# Altium PCB PX4FLOW2.1_X0.PcbDoc (part 2 of 2)
Units mm, origin at the board's own origin, x right, y up, seen from the top; angles counter-clockwise.
Board outline 26.52 x 51.99 mm, 6 copper layers (Top, Signal Layer 1, Signal Layer 2, Route2, Route15, Bottom), stack 1.474 mm thick; 94 components, 98 nets, 424 pads, 377 vias.
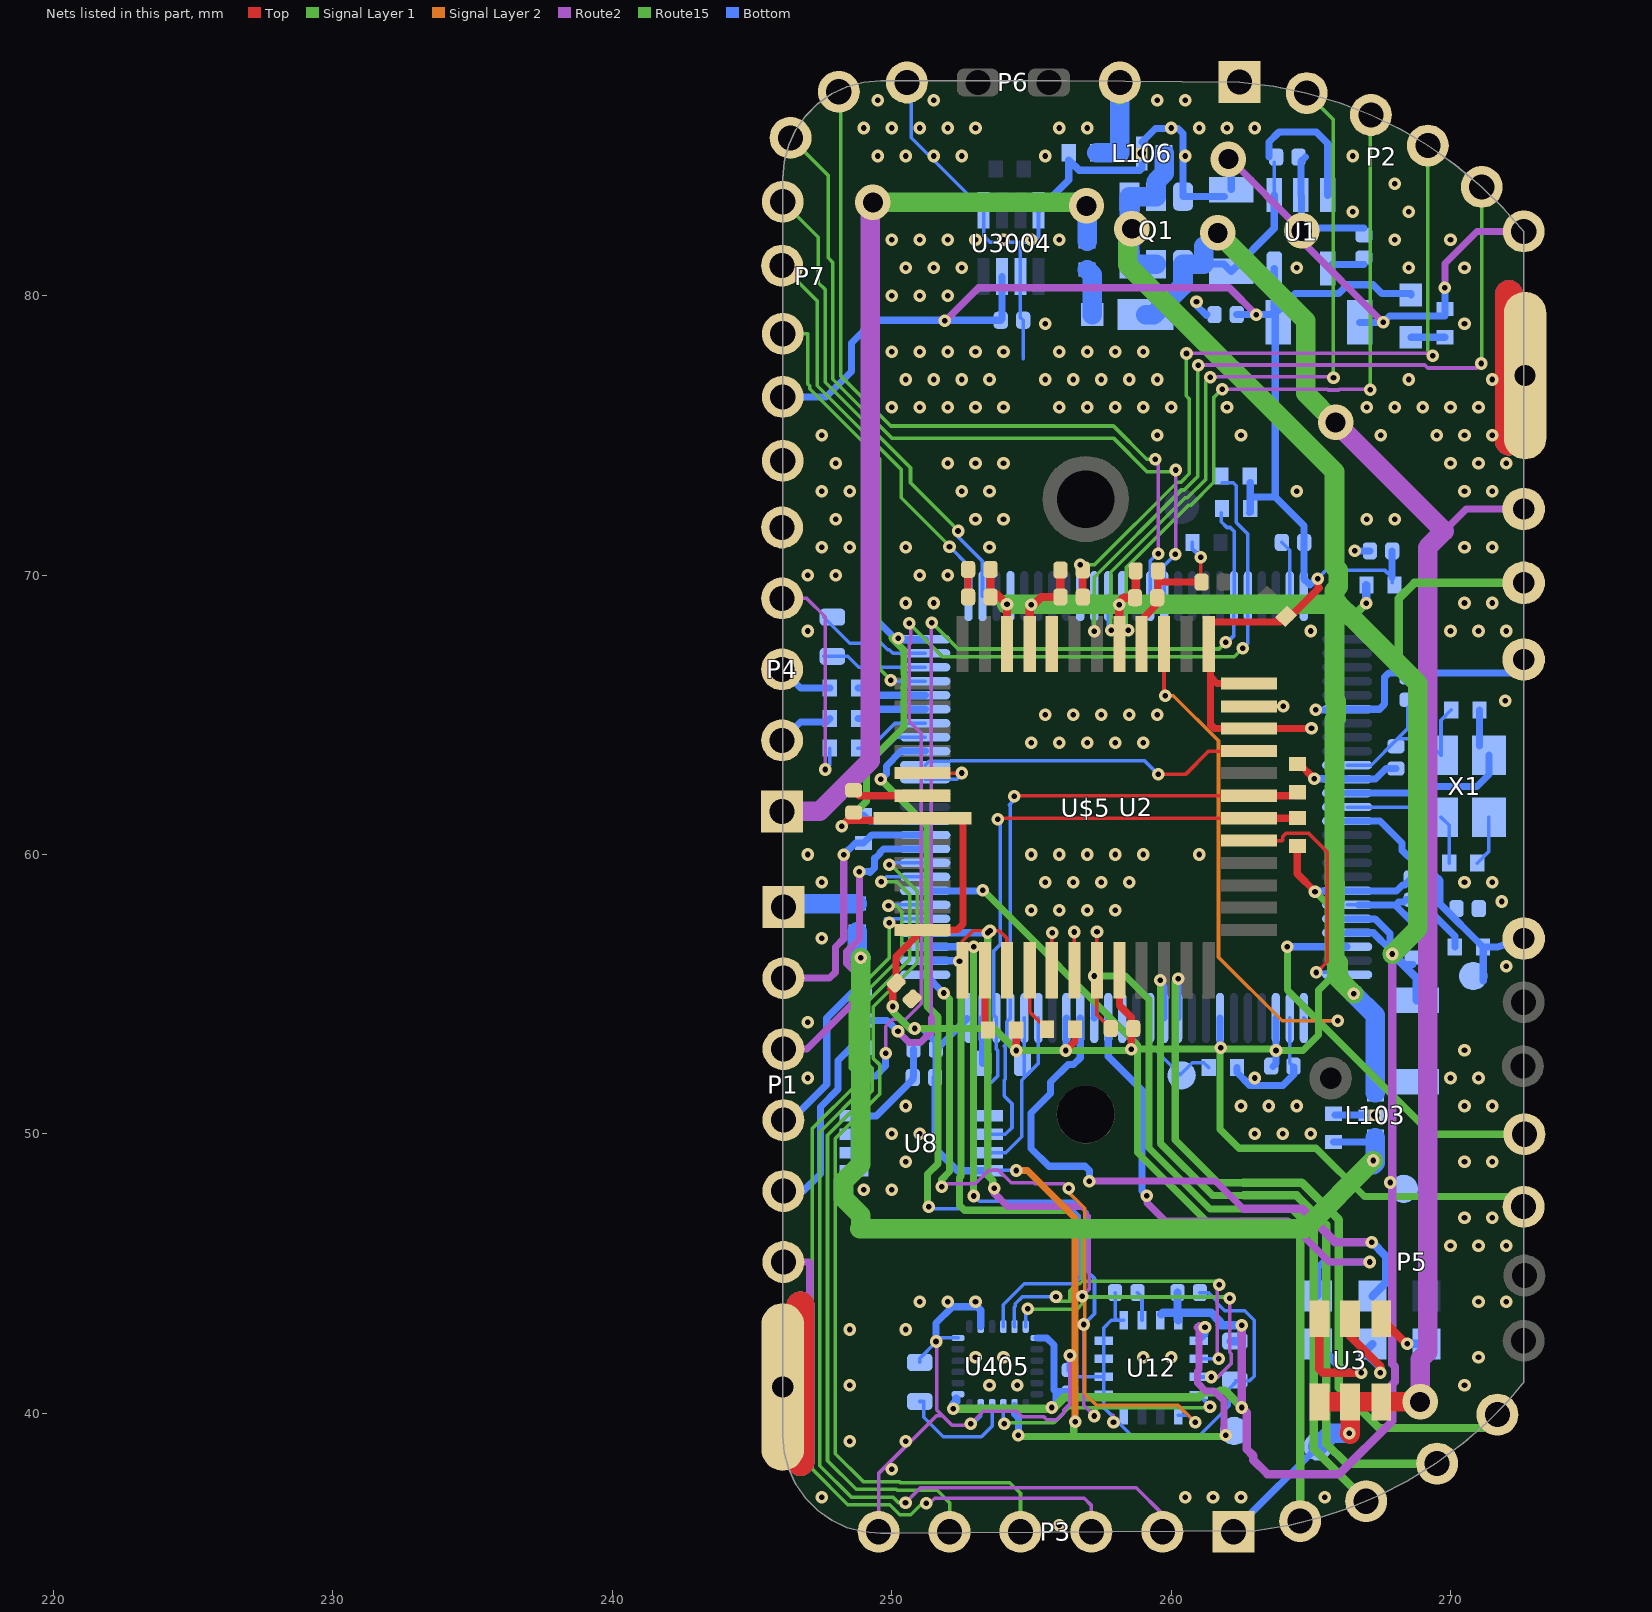
[diagram p6: the nets of this part, all layers, seen from the top]

## Via types
v1: diameter 0.45, hole 0.2, Top to Bottom, tented both sides, 258 vias
v2: diameter 0.45, hole 0.2, Route2 to Bottom, tented both sides, 95 vias
v3: diameter 0.45, hole 0.2, Top to Signal Layer 2, tented both sides, 15 vias
v4: diameter 1.27, hole 0.711, Route2 to Bottom, tented both sides, 6 vias
v5: diameter 1.27, hole 0.711, Top to Bottom, tented both sides, 2 vias
v6: diameter 0.45, hole 0.2, Top to Bottom, tented top, 1 vias

## Nets (pads, with @x,y where several pads share a name; then routed paths per layer and width w, separated by ;. In a path a pad name is that pad's centre, name@x,y a point inside that pad or via, vN(x,y) a via of type N, cw(c..) or ccw(c..) an arc to the next point about the centre after c; other vN are vias at no path point) (continued)
GND: C1.2 C2.2 C3.P$2 C4.P$1 C5.2 C6.P$2 C7.1 C8.2 C9.2 C10.2 C11.P$2 C12.P$2 C13.2 C14.P$2 C15.2 C16.2 C17.1 C18.2 C19.2 C20.2 C21.2 C22.2 C23.2 C24.2 C25.2 C26.2 C27.P$2 C28.2 C29.2 C30.2 C31.2 C32.2 C33.P$2 C34.P$2 C35.2 C36.P$2 C3004.P$2 D104.A D108.A L103.GND L106.GND P1.6 P2.6 P3.6 P4.5 P6.4 P7.7 pad.2 Q1.3 R5.2 R13.1 R18.1 U1.2 U2.10 U2.20 U2.27 U2.45 U2.46 U2.74 U2.99 U8.1 U8.2 U8.3 U8.4 U8.7 U12.8 U12.9 U12.10 U12.11 U12.12 U12.13 U405.11 U405.18 U405.20 U3004.2 U3004.5 U3004.8 U$5.7 U$5.9 U$5.11 U$5.12 U$5.13 U$5.29 U$5.34 U$5.38 U$5.48 X1.2 X1.4 | length 175.2
  Top w0.127: U$5.7@252.527,55.857 252.527,56.896 252.908,57.277 v3(253.517,57.277) 253.848,57.277 254.127,56.998 U$5.9@254.127,55.857 ; U$5.11@255.727,55.857 255.727,57.175 v3(255.753,57.201) ; U$5.12@256.54,55.857 v3(256.54,57.226) ; v3(257.346,57.233) U$5.13@257.346,55.857 257.346,54.267 C18.2@257.842,53.772 ; v1(261.061,70.637) 261.061,69.78 C1.2@261.093,69.748 ; U$5.29@262.786,65.303 v1(264.008,65.303)
  Top w0.254: C2.2@248.641,62.3 248.837,62.103 U$5.48@251.104,62.103 ; C20.2@252.736,69.215 C24.2@252.736,70.206 ; C22.2@256.838,69.215 C26.2@256.838,70.18 ; U$5.34@258.946,67.742 258.946,68.402 259.505,68.961 C19.2@259.505,69.159 ; C19.2@259.505,69.19 C19.2@259.505,69.159 ; C23.2@259.531,70.155 259.531,69.184 C19.2@259.505,69.159 ; 259.607,69.748 C1.2@261.093,69.748
  Top w1: 246.738,38.252 246.738,43.868 ; pad.2@272.087,74.778 272.087,80.063
  Route2 w0.127: P3.6@249.53,35.763 249.53,37.846 251.602,39.918 251.816,39.918 ; v2(251.587,42.57) 251.612,42.545 251.612,40.121 251.816,39.918 ; v2(256.381,42.069) 256.381,40.335 256.166,40.12 256.166,40.027 255.909,39.77 255.546,39.77 255.431,39.885 254.657,39.885 254.471,40.071 253.279,40.071 v2(252.832,39.624) 252.832,39.573 252.161,39.573 251.816,39.918 ; 257.937,39.929 v2(257.937,39.687) v2@258.058,39.808
  Route2 w0.254: pad.2@246.101,40.945 247.066,41.91 247.066,45.39 247.04,45.415 P1.6@246.126,45.415 ; v4(262.052,84.887) 262.103,84.887 v4(264.668,82.321) 264.668,81.966 v2(267.589,79.045) ; v1(269.799,80.289) 269.799,81.153 270.945,82.299 P2.6@272.622,82.299
  Bottom w0.127: C11.P$2@247.574,68.493 248.502,67.564 249.621,67.564 249.856,67.329 249.917,67.329 250.048,67.198 U2.74@251.2,67.198 ; P6.4@250.546,87.63 250.698,87.478 250.698,85.649 U3004.5@253.289,83.058 253.289,82.144 253.517,81.915 255.067,81.915 255.254,82.103 U3004.8@255.254,83.058 ; C34.P$2@251.003,41.823 251.003,41.961 v2@251.6,42.558 ; v2@251.739,42.697 U405.18@252.374,42.697 ; v2(252.832,39.624) 252.908,39.624 253.187,39.903 U405.11@253.187,40.281 ; U8.7@253.467,49.332 254.081,49.332 254.649,49.9 254.649,51.918 254.75,52.018 ; 254.604,81.859 U3004.2@254.604,80.689 254.604,79.221 C3004.P$2@254.705,79.121 254.705,77.743 ; U2.46@254.75,54.148 254.75,52.018 ; U2.45@255.25,54.148 255.25,52.518 254.75,52.018 ; v2(256.381,42.069) 256.311,42 256.311,41.548 256.554,41.306 U12.10@257.583,41.306 ; C25.2@257.994,44.323 257.994,43.426 258.089,43.331 ; U12.13@258.308,43.331 258.089,43.331 ; R18.1@260.764,71.171 260.764,70.934 v1(261.061,70.637) ; C21.2@261.029,44.323 261.327,44.323 261.657,43.993 261.657,43.931 261.914,43.675 262.635,43.675 262.973,43.336 262.973,41.333 262.8,41.159 C27.P$2@262.357,41.159 ; C27.P$2@262.306,41.159 C27.P$2@262.357,41.159 ; C35.2@263.963,71.171 264.25,70.884 U2.99@264.25,69.248 ; U2.27@264.25,54.148 264.25,52.539 C8.2@264.389,52.4 ; U2.20@266.3,58.198 U2.20@266.7,58.198 ; U2.10@266.3,63.198 267.16,63.198 268.097,64.135 ; 268.478,65.278 268.478,64.516 268.097,64.135 ; C3.P$2@270.027,65.178 269.66,64.811 X1.2@269.66,63.553 269.078,64.135 268.097,64.135 ; C4.P$1@270.959,59.692 271.374,60.106 X1.4@271.374,61.335 ; 258.089,43.331 257.859,43.331 257.583,43.055 U12.12@257.583,42.606 257.583,40.206 258.623,39.167 260.97,39.167 262.077,40.274 262.077,40.88 C27.P$2@262.357,41.159
  Bottom w0.254: U8.1@248.654,48.682 U8.2@248.654,49.332 U8.4@248.654,50.648 249.453,50.648 250.755,51.949 C30.2@250.755,52.019 ; C30.2@250.781,52.045 C9.2@250.781,53.035 ; v2(251.587,42.57) 251.587,43.231 252.171,43.815 253.06,43.815 253.187,43.688 U405.20@253.187,43.104 ; U3004.8@255.254,83.058 256.337,84.14 256.337,84.861 256.71,84.488 258.883,84.488 258.953,84.558 L106.GND@258.953,84.69 ; L106.GND@258.953,85.496 259.436,85.979 260.248,85.979 260.426,85.801 Q1.3@260.426,83.547 C6.P$2@261.905,83.547 ; v2(260.909,79.781) 260.909,79.654 261.264,79.299 261.29,79.324 ; v4(262.052,84.887) 262.153,84.887 C6.P$2@262.153,83.795 ; R5.2@262.357,52.375 262.357,52.197 262.814,51.74 264.008,51.74 264.389,52.121 C8.2@264.389,52.4 ; U1.2@264.643,83.596 264.643,84.796 C7.1@264.81,84.963 ; v4(264.668,82.321) U1.2@264.668,83.571 ; v4@264.77,82.423 266.903,82.423 ; D104.A@265.862,50.673 L103.GND@266.903,50.673 ; v1(266.573,70.866) C32.2@267.113,70.866 ; U2.20@266.7,58.198 268.014,58.198 ; C14.P$2@266.751,79.045 v2(267.589,79.045) 267.818,79.273 269.799,79.273 R13.1@269.799,79.519 v1(269.799,80.289) ; C5.2@268.63,58.382 268.402,58.382 268.314,58.294 268.143,58.294 268.047,58.198 268.014,58.198 ; C15.2@268.656,57.118 268.656,57.556 268.014,58.198
  Bottom w1: 246.738,38.252 246.738,43.868 ; pad.2@272.087,74.778 272.087,80.063
  other v1: 256,36 247.5,37 260.5,37 261.5,37 262.5,37 265.5,37 250,38 248.5,39 250.5,39 248.5,41 253.5,41 254.5,41 270.5,41 253,42 254,42 259,42 260,42 271,42 248.5,43 250.5,43 251,44 252,44 253,44 271,44 272,44 270,46 271,46 272,46 270.5,47 271.5,47 249,48 250,48 250.5,49 270.5,49 271.5,49 250,50 251,50 263,50 264,50 265,50 250.5,51 262.5,51 263.5,51 264.5,51 270.5,51 271.5,51 247,52 263,52 270,52 271,52 270.5,53 247,54 272,56 247.5,57 255,58 256,58 257,58 258,58 271.831,58.318 247.5,59 255.5,59 256.5,59 257.5,59 258.5,59 270.5,59 271.5,59 247,60 255,60 256,60 257,60 258,60 259,60 261,60 255,64 256,64 257,64 258,64 259,64 255.5,65 256.5,65 257.5,65 258.5,65 259.5,65 271.958,65.507 247,68 265,68 270,68 271,68 272,68 250.5,69 251.5,69 270.5,69 271.5,69 247,70 248,70 251,70 252,70 247.5,71 248.5,71 250.5,71 253.5,71 270.5,71 271.5,71 248,72 253,72 254,72 267,72 268,72 247.5,73 248.5,73 252.5,73 253.5,73 264.5,73 270.5,73 271.5,73 248,74 252,74 253,74 254,74 270,74 271,74 272,74 247.5,75 259.5,75 262.5,75 267.5,75 269.5,75 270.5,75 271.5,75 250,76 251,76 252,76 253,76 254,76 256,76 257,76 258,76 259,76 260,76 262,76 267,76 268,76 269,76 270,76 271,76 250.5,77 251.5,77 252.5,77 253.5,77 255.5,77 256.5,77 257.5,77 258.5,77 259.5,77 268.5,77 271.5,77 250,78 251,78 252,78 253,78 254,78 256,78 257,78 258,78 259,78 255.5,79 270.5,79 250,80 251,80 252,80 250.5,81 251.5,81 252.5,81 264.5,81 268.5,81 270.5,81 250,82 251,82 252,82 253,82 254,82 255,82 256,82 268,82 270,82 266.5,83 268.5,83 268,84 249.5,85 250.5,85 251.5,85 252.5,85 255.5,85 260.5,85 266.5,85 249,86 250,86 251,86 252,86 253,86 256,86 257,86 260,86 261,86 262,86 263,86 249.5,87 251.5,87 259.5,87 260.5,87
GREEN_LED: R15.2 U2.42 | length 21.7
  Route2 w0.254: v2(257.073,48.311) 261.595,48.311 262.59,47.315
  Route2 w0.3: 262.59,47.315 264.698,47.315 265.875,46.139 265.862,46.126 v2(267.183,46.126)
  Bottom w0.254: U2.42@256.75,54.148 256.75,52.721 256.511,52.482 256.317,52.482 255.689,51.855 255.689,51.449 254.99,50.75 254.99,49.48 255.626,48.844 256.921,48.844 257.073,48.692 v2(257.073,48.311)
  Bottom w0.3: v2(267.183,46.126) 267.691,45.618 267.691,44.679 R15.2@267.208,44.196
I2C1_SCL: R3.1 R3002.2 U2.95 | length 33.6
  Route2 w0.127: 251.418,54.153 251.418,68.284 v2(251.435,68.301)
  Route2 w0.254: v2(250.225,53.671) 250.225,53.662 250.617,53.27 251.033,53.27 251.418,53.655 251.418,54.153
  Route15 w0.127: v2(251.435,68.301) 252.381,67.354 261.715,67.354 v2(261.963,67.602)
  Bottom w0.127: R3002.2@261.798,72.238 261.798,71.907 262.003,71.703 262.12,71.703 262.253,71.57 262.253,69.252 U2.95@262.25,69.248 262.25,67.838 262.014,67.602 v2(261.963,67.602)
  Bottom w0.254: R3.1@248.996,54.059 248.996,54.057 249.839,54.057 v2(250.225,53.671)
I2C1_SCL_EXT: P1.4 R3.2 | length 6.2
  Bottom w0.254: P1.4@246.126,50.495 246.405,50.495 247.675,51.765 247.675,54.153 248.59,55.067 R3.2@248.996,55.067
I2C1_SDA: R4.1 R3004.2 U2.96 | length 37.1
  Route2 w0.127: v2(249.784,52.883) 249.784,53.85 250.043,54.11 250.502,54.11 251.054,54.661 251.054,64.332 250.622,64.764 250.622,67.503 250.679,67.56 250.679,68.218 v2(250.622,68.275)
  Route15 w0.127: v2(250.622,68.275) 251.82,67.077 262.266,67.077 v2(262.563,67.374)
  Bottom w0.127: R3004.2@261.823,73.304 262.23,73.304 262.331,73.203 262.331,71.884 262.75,71.465 U2.96@262.75,69.248 262.75,67.561 v2(262.563,67.374) v2@262.458,67.269
  Bottom w0.254: R4.1@248.996,52.078 249.436,52.078 249.784,52.426 v2(249.784,52.883)
I2C1_SDA_EXT: P1.5 R4.2 | length 7
  Bottom w0.254: P1.5@246.126,47.955 246.837,47.955 247.447,48.565 247.447,50.965 248.079,51.598 248.079,52.626 248.539,53.086 R4.2@248.996,53.086
I2C2_SCL: R1.2 U2.47 U8.6 U$5.25 | length 23.3
  Top w0.127: v1(254.381,62.078) 254.406,62.103 U$5.25@262.786,62.103
  Top w0.254: U$5.25@262.786,62.103 264.389,62.103 R1.2@264.516,62.23
  Bottom w0.127: U8.6@253.467,49.987 254.069,49.987 254.305,50.223 254.305,51.079 254.025,51.359 254.025,51.912 254.07,51.956 254.07,53.098 254.025,53.143 254.025,53.16 254.113,53.248 254.113,54.012 U2.47@254.25,54.148 254.25,61.726 254.203,61.773 254.381,61.951 v1(254.381,62.078)
I2C2_SDA: R2.1 U2.48 U8.5 U$5.24 | length 21.7
  Top w0.127: v1(253.797,61.265) 253.829,61.297 U$5.24@262.786,61.297
  Top w0.254: U$5.24@262.786,61.297 264.505,61.297 R2.1@264.516,61.308
  Bottom w0.127: U8.5@253.467,50.648 253.467,51.765 253.558,51.857 253.579,51.857 253.793,52.071 253.793,52.984 253.748,53.028 U2.48@253.75,54.148 U2.48@253.75,54.148 253.644,54.254 253.644,56.54 253.877,56.773 253.877,61.184 v1(253.797,61.265)
J\T\R\S\T\: P7.6 U2.90 | length 27.7
  Route2 w0.127: v2(260.147,70.739) 260.172,70.714 v2(260.172,73.762)
  Route15 w0.127: P7.6@246.38,85.649 247.726,84.303 247.726,81.356 247.895,81.187 247.895,77.011 250.001,74.905 257.937,74.905 259.138,73.704 260.115,73.704 v2(260.172,73.762)
  Bottom w0.127: U2.90@259.75,69.248 259.75,70.342 v2(260.147,70.739)
JTCK-SWCLK: P7.3 U2.76 | length 14.6
  Route15 w0.127: P7.3@246.075,81.077 247.341,79.811 247.341,76.781 250.342,73.78 250.342,72.771 252.095,71.018 v2(252.07,71.018)
  Bottom w0.127: v2@252.095,70.993 252.75,70.338 U2.76@252.75,69.248
JTDI: P7.5 U2.77 | length 17.1
  Route15 w0.127: P7.5@246.101,83.363 247.371,82.093 247.371,80.467 247.618,80.22 247.618,76.896 250.673,73.842 250.673,73.304 252.374,71.603 v2(252.374,71.577)
  Bottom w0.127: v2(252.374,71.577) 252.374,71.374 253.25,70.499 U2.77@253.25,69.248
JTDO: P7.4 U2.89 | length 28
  Route2 w0.127: v2(259.436,74.143) 259.537,74.244 v2(259.537,70.764)
  Route15 w0.127: P7.4@248.107,87.3 248.172,87.235 248.172,77.126 249.961,75.336 257.937,75.336 259.131,74.143 v2(259.436,74.143)
  Bottom w0.127: U2.89@259.25,69.248 259.25,70.518 259.496,70.764 v2(259.537,70.764)
JTMS-SWDIO: P7.2 U2.72 | length 15.8
  Route15 w0.127: P7.2@246.101,78.638 246.999,78.638 246.999,76.842 247.064,76.777 247.064,76.667 249.567,74.164 249.567,66.637 v2(249.961,66.243)
  Bottom w0.127: v2(249.961,66.243) 250.006,66.198 U2.72@251.2,66.198
M\P\U\_\C\S\: U2.67 U405.22 | length 30.2
  Route15 w0.254: v2(249.606,62.687) 251.257,61.036 251.257,54.585 251.663,54.178 251.663,48.946 251.282,48.565 251.282,47.447 v2(251.333,47.396)
  Bottom w0.127: v2(251.333,47.396) 251.409,47.32 256.464,47.32 256.718,47.066 256.718,44.806 256.547,44.635 254.747,44.635 253.997,43.884 U405.22@253.997,43.104
  Bottom w0.254: v2(249.606,62.687) 249.808,62.89 249.808,63.169 250.338,63.698 U2.67@251.2,63.698
MAG_DRDY---: P5.2 U2.36 | length 26.5
  Route15 w0.254: v2(259.613,55.499) 259.613,49.667 261.478,47.803 262.611,47.803
  Route15 w0.3: 262.611,47.803 264.493,47.803 265.55,46.746 265.55,38.921 266.27,38.202 P5.2@269.519,38.202
  Bottom w0.254: v2(259.613,55.499) 259.613,55.397 259.75,55.261 U2.36@259.75,54.148
NetC3_P$1: C3.P$1 U2.12 X1.3 | length 7.3
  Bottom w0.254: U2.12@266.3,62.198 268.65,62.198 268.884,62.433 270.942,62.433 271.374,62.865 X1.3@271.374,63.553 ; X1.3@271.035,63.891 C3.P$1@271.035,65.178
NetC4_P$2: C4.P$2 U2.13 X1.1 | length 4.8
  Bottom w0.127: U2.13@266.3,61.698 X1.1@269.297,61.698 ; X1.1@269.66,61.335 269.951,61.044 C4.P$2@269.951,59.692
NetC11_P$1: C11.P$1 U2.73 | length 3.8
  Bottom w0.127: C11.P$1@247.574,67.093 248.426,67.093 248.82,66.698 U2.73@251.2,66.698
NetC12_P$1: C12.P$1 U2.49 | length 1.6
  Bottom w0.254: C12.P$1@253.249,52.527 U2.49@253.249,54.148
NetC13_1: C13.1 U1.4 | length 1.2
  Bottom w0.254: U1.4@265.745,81.113 C13.1@266.903,81.113
NetC25_1: C25.1 U12.14 | length 1.1
  Bottom w0.127: C25.1@258.794,44.323 258.958,44.159 U12.14@258.958,43.331
NetD1_ANODE: D1.ANODE L8.1 | length 1.7
  Bottom w0.7: L8.1@256.997,80.932 257.175,80.755 D1.ANODE@257.175,79.324
NetD104_C: D104.C L2.1 L103.P$2 | length 33.1
  Signal Layer 1 w0.7: v1(248.895,56.312) 248.895,48.92 248.275,48.3 248.275,47.7 248.895,47.08 248.895,46.63 248.865,46.601 264.787,46.601 v1(267.233,49.047)
  Bottom w0.254: D104.C@265.811,49.716 L103.P$2@267.165,49.716
  Bottom w0.7: L2.1@248.768,57.234 248.768,56.439 v1(248.895,56.312) ; v1(267.233,49.047) 267.233,48.895 267.31,48.971 L103.P$2@267.31,49.86
NetD108_C: D108.C L106.P$2 P6.1 | length 3.8
  Signal Layer 1 w0.7: P6.1@258.166,87.198 P6.1@258.166,87.63
  Bottom w0.7: D108.C@257.345,85.115 258.166,85.115 P6.1@258.166,87.63
NetL2_2: L2.2 P1.1 | length 2.7
  Bottom w0.254: P1.1@246.126,58.115 P1.1@246.253,58.242
  Bottom w0.7: P1.1@246.253,58.242 L2.2@248.768,58.242
NetLED1_C: LED1.C R13.2 | length 1.2
  Bottom w0.254: LED1.C@268.58,78.511 R13.2@269.799,78.511
NetR14_1: R14.1 U3.C3 | length 5.6
  Top w0.3: U3.C3@265.304,43.385 265.304,41.581 265.433,41.453 v1(266.802,41.453)
  Bottom w0.3: R14.1@265.278,42.684 265.303,42.658 265.176,42.531 266.255,41.453 v1(266.802,41.453)
NetR15_1: R15.1 U3.C2 | length 3.8
  Top w0.3: U3.C2@266.404,43.385 266.404,42.764 267.487,41.681 v1(267.487,41.453)
  Bottom w0.3: R15.1@267.208,42.482 266.924,42.199 267.487,41.636 v1(267.487,41.453)
NetR17_1: R17.1 U3.C1 | length 2
  Top w0.3: U3.C1@267.522,43.385 268.413,42.494 v1(268.453,42.494)
  Bottom w0.3: v1(268.453,42.494) 269.127,42.494 R17.1@269.138,42.482
NetR19_1: R19.1 U$5.8 | length 2.2
  Top w0.254: U$5.8@253.34,55.857 253.34,53.831 R19.1@253.449,53.721
NetR20_1: R20.1 U$5.10 | length 2.4
  Top w0.127: U$5.10@254.94,55.857 254.94,54.364 R20.1@255.557,53.746
OTG_FS_ID: R7.2 U2.69 | length 2.8
  Bottom w0.127: R7.2@248.793,63.805 249.225,63.805 250.118,64.698 U2.69@251.2,64.698
OTG_FS_N: R6.2 U2.70 | length 2.5
  Bottom w0.254: R6.2@248.793,64.872 249.174,64.872 249.501,65.198 U2.70@251.2,65.198
OTG_FS_P: R8.2 U2.71 | length 2.5
  Bottom w0.254: R8.2@248.793,65.964 249.25,65.964 249.516,65.698 U2.71@251.2,65.698
OTG_ID: P4.4 R7.1 | length 8.1
  Route2 w0.127: P4.4@246.075,69.164 246.964,69.164 247.625,68.504 v2(247.625,63.043)
  Bottom w0.127: v2(247.625,63.043) 247.785,63.203 R7.1@247.785,63.805
OTG_N: P4.2 R6.1 | length 2
  Bottom w0.254: P4.2@246.075,64.084 246.736,64.745 247.658,64.745 R6.1@247.785,64.872
OTG_P: P4.3 R8.1 | length 2
  Bottom w0.254: P4.3@246.075,66.624 246.736,65.964 R8.1@247.785,65.964
PB2-BOOT1: BOOT1.P$1 R5.1 U2.37 | length 3.7
  Bottom w0.127: U2.37@259.25,54.148 259.25,53.196 260.325,52.121 260.756,52.553 261.171,52.553 R5.1@261.349,52.375
POWER: P1.2 R12.1 U2.61 | length 9.5
  Route2 w0.254: P1.2@246.126,55.575 247.777,55.575 247.989,55.787 247.989,56.687 248.285,56.983 v2(248.285,59.995)
  Bottom w0.254: v2(248.285,59.995) 248.699,60.409 R12.1@248.996,60.409 249.291,60.704 251.194,60.704 U2.61@251.2,60.698
PRES_DRDY---: P5.1 U2.35 | length 26.7
  Route15 w0.254: v2(260.248,55.55) 260.148,55.449 260.148,49.783 261.678,48.253 262.585,48.253
  Route15 w0.3: 262.585,48.253 264.679,48.253 266,46.932 266,40.919 267.443,39.476 271.201,39.476 P5.1@271.678,39.954
  Bottom w0.254: v2(260.248,55.55) 260.248,54.15 U2.35@260.25,54.148
PWM: P1.3 U2.60 | length 11.3
  Route2 w0.254: P1.3@246.126,53.035 246.964,53.035 248.844,54.915 248.844,55.653 248.393,56.104 248.393,56.52 248.844,56.971 v2(248.844,59.385)
  Bottom w0.254: v2(248.844,59.385) 249.199,59.385 249.225,59.36 249.383,59.518 249.383,59.873 249.389,59.878 249.416,59.878 249.578,60.04 249.578,60.067 249.709,60.198 U2.60@251.2,60.198
PWM_EN: R12.2 U2.62 | length 2.3
  Bottom w0.254: R12.2@248.996,61.417 249.215,61.198 U2.62@251.2,61.198
R\E\S\E\T\: !RESET.P1 C17.2 pad.3 R16.1 U2.14 | length 10.1
  Bottom w0.254: U2.14@266.3,61.198 267.477,61.198 268.269,60.406 268.269,60.153 268.709,59.713 268.976,59.713 269.416,59.272 269.42,59.272 269.616,59.076 269.616,58.239 R16.1@271.162,56.693 ; !RESET.P1@271.17,55.474 271.17,56.685 R16.1@271.162,56.693 ; pad.3@272.618,56.991 271.687,56.693 R16.1@271.162,56.693
RED_LED: R14.2 U2.40 | length 19
  Route2 w0.254: v2(259.131,47.78) 259.131,47.549 259.791,46.888 264.185,46.888 265.659,45.415 v2(267.106,45.415)
  Bottom w0.254: U2.40@257.75,54.148 257.75,52.765 258.953,51.562 258.953,47.958 v2(259.131,47.78) ; R14.2@265.252,44.196 265.252,45.11 265.201,45.161 265.455,45.415 v2(267.106,45.415)
REGOUT: C34.P$1 U405.10 | length 4.3
  Bottom w0.127: C34.P$1@251.003,40.423 251.144,40.423 251.144,39.864 251.841,39.167 253.213,39.167 253.594,39.548 U405.10@253.594,40.281
SPI1_MOSI---: P5.4 U2.32 | length 16
  Route15 w0.254: v2(261.772,53.086) 261.747,53.061 261.747,50.165 262.424,49.488 265.191,49.488 266.924,47.755 272.26,47.755 P5.4@272.618,47.396
  Bottom w0.254: U2.32@261.75,54.148 261.75,53.109 v2(261.772,53.086)
SPI2_MISO: U2.53 U12.4 U405.9 | length 31.9
  Route2 w0.127: v2(256.87,43.18) 256.87,40.284 v2(257.251,39.903)
  Route15 w0.127: v2(254.032,39.632) 254.032,39.668 255.807,39.668 256.166,40.027 256.166,40.04 256.332,40.206 257.327,40.206 ; v2(257.251,39.903) 257.327,39.98 257.327,40.206 ; v2(261.391,40.234) 261.364,40.206 257.327,40.206
  Route15 w0.254: v2(252.933,47.777) v2(252.933,56.693)
  Bottom w0.127: v2(252.933,47.777) 252.959,47.777 253.139,47.597 256.593,47.597 256.997,47.193 256.997,45.085 257.258,44.824 257.258,43.568 v2(256.87,43.18) ; U405.9@253.997,40.281 253.997,39.668 v2(254.032,39.632) ; U12.4@260.983,40.656 261.391,40.247 v2(261.391,40.234)
  Bottom w0.254: U2.53@251.2,56.698 252.928,56.698 v2(252.933,56.693)
SPI2_MOSI: U2.54 U12.3 U405.24 | length 30.5
  Route2 w0.127: 256.743,47.396 257.073,47.066 257.073,44.45 v2(256.819,44.196) ; v2(261.442,41.3) 261.671,41.3 262.145,41.774 262.145,42.137 262.096,42.186 v2(262.096,44.113)
  Route2 w0.254: v2(253.67,48.057) 253.67,47.875 254.149,47.396 256.743,47.396
  Route15 w0.127: v2(254.864,43.739) 254.87,43.732 256.635,43.732 256.819,43.917 v2(256.819,44.196) 256.852,44.164 261.903,44.164 261.935,44.196 262.013,44.196 v2(262.096,44.113)
  Route15 w0.254: v2(253.439,57.198) 253.439,48.514 253.617,48.336 253.617,48.11 v2(253.67,48.057)
  Bottom w0.127: U405.24@254.797,43.104 254.797,43.806 v2(254.864,43.739) ; U12.3@260.983,41.306 260.988,41.3 v2(261.442,41.3)
  Bottom w0.254: U2.54@251.2,57.198 v2(253.439,57.198)
SPI2_NSS: U2.51 U12.5 | length 25.6
  Route2 w0.127: v2@251.924,48.216 252.987,48.216 253.463,48.692 253.837,48.692 254.276,48.253 255.077,48.253 255.114,48.216 256.178,48.216 v1(256.337,48.057)
  Signal Layer 2 w0.127: v1(256.337,48.057) 256.337,47.955 256.311,47.93 256.906,47.335 256.906,46.361 256.908,46.359 256.908,45.843 256.908,44.802 256.906,44.799 256.906,40.706 257.327,40.284 260.248,40.284 v1(260.858,39.675)
  Route15 w0.254: v2(251.79,48.108) 251.79,48.372 252.07,48.651 252.07,54.829 v2(251.856,55.042)
  Bottom w0.127: U12.5@260.258,39.931 260.602,39.931 v1(260.858,39.675)
  Bottom w0.254: U2.51@251.2,55.698 v2(251.856,55.042)
SPI2_SCK: U2.52 U12.2 U405.23 | length 29.4
  Route2 w0.127: v2(261.706,41.956) 261.652,42.01 261.652,43.26 261.645,43.267 261.645,44.729 261.62,44.704 v2(261.722,44.602)
  Route15 w0.127: v2(255.88,44.171) 255.88,44.009 256.386,44.009 256.381,44.014 256.381,44.378 256.638,44.635 256.725,44.635 256.819,44.729 ; 256.261,47.269 256.819,46.711 256.819,44.729 ; v2(261.722,44.602) 261.722,44.628 261.62,44.729 256.819,44.729
  Route15 w0.254: v2(252.425,56.185) 252.474,56.136 252.474,48.484 252.425,48.435 252.425,47.447 252.603,47.269 256.261,47.269
  Bottom w0.127: U405.23@254.397,43.104 254.386,43.115 254.386,43.787 254.425,43.826 254.425,43.92 254.682,44.177 255.873,44.177 v2(255.88,44.171) ; U12.2@260.983,41.956 v2(261.706,41.956)
  Bottom w0.254: U2.52@251.2,56.198 252.439,56.198 v2(252.425,56.185)
TIM5_CH1: P5.7 U2.23 | length 14.4
  Route15 w0.254: v2@264.211,56.744 v2(264.16,56.693) 264.16,55.145 269.317,49.987 P5.7@272.644,49.987
  Bottom w0.254: v2(264.16,56.693) 264.166,56.698 U2.23@266.3,56.698
TIM5_CH3_EXPOSURE: U2.25 U$5.23 | length 8.9
  Top w0.127: U$5.23@262.786,60.497 263.976,60.497 263.997,60.518 263.997,60.642 264.123,60.767 264.909,60.767 265.589,60.087 265.589,56.166 v1(265.201,55.778)
  Bottom w0.127: v1(265.201,55.778) 266.118,55.778 266.169,55.829 U2.25@266.3,55.698
TIM5_CH4_STANDBY: U2.26 U$5.33 | length 18.7
  Top w0.127: U$5.33@259.746,67.539 259.746,65.729 v3(259.791,65.684)
  Signal Layer 2 w0.127: v3(259.791,65.684) 260.081,65.684 261.696,64.069 261.696,56.327 263.972,54.051 v1(265.963,54.051)
  Bottom w0.127: U2.26@264.75,54.148 264.847,54.051 v1(265.963,54.051)
TIM8_CH3_MASTERCLOCK: U2.65 U$5.47 | length 2.8
  Top w0.127: U$5.47@251.104,62.916 v1(252.501,62.916)
  Bottom w0.127: U2.65@251.2,62.698 252.335,62.698 252.501,62.865 v1(252.501,62.916)
TIM8_CH4_LED_OUT: U2.66 U$5.27 | length 12.2
  Top w0.127: v1(259.537,62.865) 260.513,62.865 261.351,63.703 U$5.27@262.786,63.703
  Bottom w0.127: U2.66@251.2,63.198 251.336,63.335 252.1,63.335 252.12,63.354 259.048,63.354 v1(259.537,62.865)
UART4_RX: U2.79
US_EN1: U2.39
US_EN2: P5.8 U2.41 | length 26.7
  Route15 w0.254: v2(257.251,55.651) 258.369,55.651 259.207,54.813 259.207,49.555 259.209,49.553 259.209,49.5 261.396,47.313 262.661,47.313
  Route15 w0.3: 262.661,47.313 264.346,47.313 265.1,46.56 265.1,38.735 P5.8@266.979,36.855
  Bottom w0.254: U2.41@257.25,54.148 257.251,54.15 v2(257.251,55.651)
USART2_CTS: P2.4 U2.84 | length 27.1
  Route2 w0.127: v1(260.55,77.93) 260.565,77.944 v2@269.299,77.944
  Route15 w0.127: v2(256.75,70.365) 257.258,70.365 260.216,73.323 260.354,73.323 260.655,73.624 260.655,76.302 260.536,76.42 260.536,77.916 v1(260.55,77.93) ; P2.4@269.188,85.373 269.188,78.03 v2(269.367,77.851)
  Bottom w0.127: U2.84@256.75,69.248 v2(256.75,70.365)
USART2_RTS: P2.5 U2.85 | length 28.9
  Route2 w0.127: v1(260.975,77.506) 260.989,77.52 269.078,77.52 269.185,77.412 270.935,77.412 v2(271.094,77.572)
  Route15 w0.127: v2(257.25,67.997) 257.25,69.925 260.371,73.046 260.469,73.046 260.96,73.538 260.96,77.491 v1(260.975,77.506) ; v2(271.094,77.572) 271.118,77.596 P2.5@271.118,83.891
  Bottom w0.127: v2(257.25,67.997) U2.85@257.25,69.248
USART2_RX: P2.3 U2.87 | length 26.8
  Route2 w0.127: v1(261.823,76.657) 265.597,76.657 265.629,76.625 265.993,76.625 266.025,76.657 v2@267.132,76.657
  Route15 w0.127: v2(258.47,68.021) 258.394,67.945 258.394,70.271 260.615,72.492 260.698,72.492 261.524,73.319 261.524,76.358 v1(261.823,76.657) ; v2(267.132,76.632) 267.132,86.447 P2.3@267.152,86.467
  Bottom w0.127: U2.87@258.25,69.248 258.299,69.199 258.299,68.192 v2(258.47,68.021)
USART2_TX: P2.2 U2.86 | length 26.9
  Route2 w0.127: v1(261.399,77.081) 261.413,77.096 v2@265.811,77.096
  Route15 w0.127: v2(257.861,68.021) 257.835,67.996 257.835,70.104 260.501,72.769 260.583,72.769 261.247,73.433 261.247,76.93 v1(261.399,77.081) ; P2.2@264.855,87.252 265.811,86.296 v2(265.811,77.064)
  Bottom w0.127: U2.86@257.75,69.248 257.75,68.132 v2(257.861,68.021)
USART3_CK: P5.3 U2.57 | length 31
  Route15 w0.254: v2(253.263,58.725) 258.803,53.185 258.803,49.335 261.275,46.863 262.534,46.863
  Route15 w0.3: 262.534,46.863 264.16,46.863 264.617,46.406 P5.3@264.617,36.144
  Bottom w0.254: U2.57@251.2,58.698 253.237,58.698 v2(253.263,58.725)
USART3_CTS: P3.5 U2.58 | length 30.5
  Route15 w0.127: v2(249.631,59.03) 250.179,59.03 250.639,58.57 250.639,56.238 249.068,54.667 249.068,52.586 249.303,52.351 249.303,51.55 247.703,49.95 247.703,38.303 248.726,37.281 250.158,37.281 250.196,37.243 251.631,37.243 252.07,36.805 P3.5@252.07,35.763
  Bottom w0.127: v2(249.631,59.03) 249.8,59.198 U2.58@251.2,59.198
USART3_RTS: P3.4 U2.59 | length 32.9
  Route15 w0.127: v2(249.911,59.639) 249.936,59.665 250.916,58.684 250.916,56.124 249.345,54.552 249.345,52.701 249.58,52.466 249.58,51.435 247.98,49.835 247.98,38.557 248.98,37.558 250.273,37.558 250.311,37.52 254.224,37.52 254.61,37.135 P3.4@254.61,35.763
  Bottom w0.127: v2(249.911,59.639) 249.911,59.69 249.919,59.698 U2.59@251.2,59.698
USART3_RX: P3.2 U2.56 | length 37.3
  Route2 w0.127: v2(250.495,36.805) 251.028,37.338 258.746,37.338 259.69,36.395 P3.2@259.69,35.763
  Route15 w0.127: v2(249.885,58.166) 250.159,58.166 250.362,57.963 250.362,56.353 248.791,54.782 248.791,52.472 249.026,52.236 249.026,51.664 247.426,50.064 247.426,38.125 248.548,37.004 250.043,37.004 250.243,36.805 v2(250.495,36.805)
  Bottom w0.127: v2@249.885,58.198 249.853,58.198 v2(249.885,58.166) 249.918,58.198 U2.56@251.2,58.198
USART3_TX: P3.3 U2.55 | length 34.5
  Route2 w0.127: v2(251.231,36.779) 251.358,36.779 251.536,36.957 256.896,36.957 257.15,36.703 P3.3@257.15,35.763
  Route15 w0.127: v2(249.911,57.556) 249.911,56.293 248.514,54.897 248.514,52.357 248.749,52.122 248.749,51.779 247.149,50.179 247.149,38.011 248.433,36.727 249.929,36.727 250.289,36.366 250.679,36.366 251.092,36.779 v2(251.231,36.779)
  Bottom w0.127: v2(249.911,57.556) 249.769,57.698 U2.55@251.2,57.698
VBUS: L8.2 P4.1 U2.68 | length 39.1
  Route2 w0.7: P4.1@246.075,61.544 247.421,61.544 249.236,63.359 249.236,83.247 v4(249.326,83.337)
  Route15 w0.7: v4(249.326,83.337) 256.845,83.337 v4(256.972,83.21)
  Bottom w0.127: P4.1@246.075,61.544 247.523,61.544 250.177,64.198 U2.68@251.2,64.198
  Bottom w0.7: v4(256.972,83.21) 256.997,83.185 L8.2@256.997,81.94
VCC: C2.1 C5.1 C8.1 C9.1 C10.1 C14.P$1 C16.1 C18.1 C28.1 C29.1 C30.1 C31.1 C32.1 C35.1 C3004.P$1 L11.1 LED1.A P7.1 pad.6 R1.1 R2.2 R9.2 R16.2 R19.2 R20.2 R3002.1 R3004.1 U1.5 U2.6 U2.11 U2.19 U2.28 U2.43 U2.50 U2.75 U2.100 U8.8 U12.1 U405.8 U3004.3 U$5.1 U$5.6 U$5.14 U$5.28 U$5.30 U$5.31 VDD_3V3.P$1 | length 169.7
  Top w0.254: v1(248.209,61.011) 248.425,61.227 251.034,61.227 U$5.1@251.104,61.297 252.343,61.297 252.552,61.087 252.552,57.506 252.343,57.297 U$5.6@251.104,57.297 250.161,56.353 C16.1@250.161,55.401 249.961,55.201 250.038,55.125 v6(250.038,54.559) ; v3(254.457,52.984) R19.2@254.457,53.721 ; v1(256.235,52.984) 256.565,53.315 R20.2@256.565,53.746 ; U$5.14@258.146,55.857 258.146,54.604 258.572,54.178 v3(258.572,53.035) ; U$5.30@262.786,66.116 261.645,66.116 261.417,66.345 ; R2.2@264.516,60.3 264.516,59.309 v1(265.151,58.674) ; R1.1@264.516,63.238 264.6,63.238 v1(265.125,62.713) ; v1(265.024,64.516) U$5.28@262.786,64.516 261.544,64.516 261.417,64.643 261.417,66.345 ; v1(265.252,69.875) 265.252,69.596 265.303,69.545 264.283,68.526 R9.2@264.113,68.526 263.913,68.326 261.518,68.326 261.346,68.154 U$5.31@261.346,67.539 261.417,67.468 261.417,66.345
  Route2 w0.254: v2(251.892,79.096) 251.918,79.096 253.106,80.283 262.083,80.283 v2(263.042,79.324) ; v2(261.214,43.078) 260.934,43.078 260.996,43.14 260.996,41.564 260.94,41.508 260.94,41.092 261.234,40.798 261.537,40.798 261.899,40.436 261.899,39.268 v2(261.95,39.218)
  Signal Layer 1 w0.254: v6(250.038,54.559) 250.038,54.381 250.698,53.721 250.749,53.772 v1(250.825,53.772) 253.67,53.772 v3(254.457,52.984) v1(256.235,52.984) 258.572,52.984 v3(258.572,53.035) 263.703,53.035 v1(263.754,52.984) 264.719,52.984 265.278,53.543 265.278,55.145 265.703,55.57 265.703,58.121 v1(265.151,58.674)
  Signal Layer 2 w0.254: v1(254.457,48.692) 254.864,48.692 256.565,46.99 256.565,46.22 256.568,46.218 256.568,44.943 256.565,44.94 v1(256.565,39.7)
  Route15 w0.254: v1(248.209,61.011) 249.104,61.906 249.104,63.227 250.444,64.567 250.444,66.016 250.463,66.035 250.463,66.451 250.444,66.471 250.444,67.31 250.012,67.742 v2(250.241,67.742) ; v2(254.533,39.218) 254.585,39.166 256.515,39.166 ; v1(256.565,39.7) 256.515,39.649 256.515,39.166 ; v2(261.95,39.218) 261.899,39.166 256.515,39.166
  Bottom w0.127: U8.8@253.467,48.682 253.476,48.692 v1(254.457,48.692) ; v1(265.252,69.875) 265.557,70.18 267.64,70.18 267.913,69.907 L11.1@267.913,69.732
  Bottom w0.254: P7.1@246.101,76.378 247.65,76.378 248.564,77.292 248.564,78.308 249.377,79.121 C3004.P$1@253.905,79.121 253.949,79.165 U3004.3@253.949,80.689 ; C10.1@249.401,68.445 249.994,67.851 ; v2@250.147,67.698 U2.75@251.2,67.698 ; v1(250.825,53.772) 251.104,53.772 251.581,53.296 C9.1@251.581,53.035 C9.1@251.581,53.005 ; U2.50@252.699,54.123 C9.1@251.581,53.005 ; U8.8@253.467,48.682 252.359,48.682 251.555,49.486 C30.1@251.555,52.019 251.581,52.045 C9.1@251.581,53.005 ; U405.8@254.397,40.281 254.397,39.978 254.534,39.84 v2(254.533,39.218) ; v1(256.235,52.984) 256.235,54.134 U2.43@256.25,54.148 ; U12.1@260.983,42.606 261.214,42.836 v2(261.214,43.078) ; C31.1@262.35,79.324 v2(263.042,79.324) C14.P$1@263.548,79.324 ; R3002.1@262.806,72.238 262.831,72.263 262.831,72.796 ; R3004.1@262.831,73.304 262.831,72.796 ; C8.1@263.644,52.408 263.75,52.513 U2.28@263.75,54.148 ; U1.5@263.693,80.975 C14.P$1@263.693,79.324 ; C35.1@264.75,71.157 264.75,69.87 264.973,69.647 265.201,69.875 v1(265.252,69.875) ; C35.1@264.763,71.171 264.763,71.761 263.728,72.796 ; v1(265.125,62.713) 266.286,62.713 U2.11@266.3,62.698 267.31,62.698 267.686,63.075 C28.1@268.046,63.075 ; v1(265.151,58.674) 265.175,58.698 U2.19@266.3,58.698 268.071,58.698 268.285,58.913 268.361,58.913 C5.1@268.63,59.182 268.707,59.182 269.212,58.676 269.212,58.088 269.189,58.065 269.189,58.039 270.154,57.074 R16.2@270.154,56.693 ; v2(265.176,65.176) 266.278,65.176 U2.6@266.3,65.198 267.459,65.198 267.64,65.38 267.64,66.345 267.792,66.497 272.136,66.497 pad.6@272.618,66.98 ; L11.1@267.913,69.907 C32.1@267.913,70.866 ; LED1.A@268.58,80.023 268.58,80.072 267.545,80.072 267.226,80.391 266.294,80.391 266.164,80.262 266.164,80.251 265.985,80.072 264.44,80.072 C14.P$1@263.693,79.324 ; 262.831,72.796 263.728,72.796 ; C14.P$1@263.693,79.324 263.728,79.289 263.728,72.796
VDD_3V3_ANALOG: C15.1 C19.1 C20.1 C21.1 C22.1 C23.1 C24.1 C26.1 C27.P$1 C33.P$1 C36.P$1 L11.2 pad.5 U2.21 U2.22 U12.15 U12.16 U405.1 U405.13 U$5.35 U$5.39 U$5.40 VDD_3V3_ANALOG.P$1 | length 98
  Top w0.3: C20.1@253.536,69.215 C24.1@253.536,70.206 ; C20.1@253.786,69.291 v3(254.127,68.951) U$5.40@254.127,67.539 ; U$5.39@254.94,67.539 v3@254.94,68.798 ; v3@255.034,68.892 255.357,69.215 C22.1@256.038,69.215 C26.1@256.038,70.18 ; U$5.35@258.146,67.539 v3@258.146,68.936 ; v3@258.146,69.033 258.303,69.19 C19.1@258.705,69.19 ; C19.1@258.731,69.281 C23.1@258.731,70.155
  Route2 w0.3: v2(262.534,43.155) v2(262.534,40.208) 262.712,40.03 262.712,38.71 262.941,38.481 262.941,38.329 263.444,37.825 266.019,37.825 267.919,39.726 267.919,41.041 268.012,41.134 268.012,41.67 267.919,41.763 v1(267.919,56.439)
  Signal Layer 1 w0.3: 266.471,68.478 v1(266.99,68.997) ; 268.148,66.802 268.148,69.164 268.707,69.723 pad.5@272.618,69.723
  Signal Layer 1 w0.7: v3(254.127,68.951) 265.999,68.951 266.471,68.478 268.834,66.116 268.834,57.353 v1(267.919,56.439)
  Route15 w0.3: v2(252.197,40.157) 254.959,40.157 255.676,40.157 v2(255.727,40.208) 255.82,40.208 256.193,40.581 260.996,40.581 261.174,40.759 261.694,40.759 261.753,40.818 261.925,40.818 v2(262.534,40.208)
  Bottom w0.254: U405.1@255.197,42.697 255.549,42.697 255.803,42.443 255.803,40.843 ; U2.22@266.3,57.198 267.236,57.198 267.83,56.604 267.83,57.163 267.295,57.698 U2.21@266.3,57.698 ; v1@267.957,56.477 268.359,56.076 268.351,56.068 C15.1@268.656,56.068
  Bottom w0.3: v2(252.197,40.157) 252.197,40.31 252.308,40.421 252.308,40.526 ; v2(255.727,40.208) 255.899,40.38 255.899,40.748 C33.P$1@256.311,40.748 ; U12.15@259.639,43.536 259.707,43.603 U12.16@260.229,43.603 ; C21.1@260.229,44.323 U12.16@260.229,43.603 ; U12.16@260.258,43.331 260.229,43.359 U12.16@260.229,43.603 ; C27.P$1@262.128,42.585 262.422,42.585 262.534,42.697 v2(262.534,43.155) 261.772,43.155 261.739,43.188 261.739,43.296 261.431,43.603 U12.16@260.229,43.603 ; v1(266.99,68.997) L11.2@266.99,69.647 ; v1(267.919,56.439) 268.783,55.575 C36.P$1@268.783,54.79
  other v2: 267.843,48.26
  other v3: 254.991,68.936 258.14,68.936
VDD_5V: C6.P$1 C7.2 D1.CATHODE P2.1 P3.1 pad.4 Q1.4 U1.1 U1.3 U3.A1 U3.A2 U3.A3 VDD_5V.P$1 | length 73.9
  Top w0.127: U3.A2@266.404,40.411 U3.A2@266.437,40.411
  Top w0.7: U3.A3@265.304,40.411 U3.A2@266.404,40.411 266.404,39.259 v1(266.37,39.294) ; U3.A2@266.361,40.488 266.437,40.411 U3.A1@267.522,40.411 ; U3.A1@267.481,40.37 U3.A1@267.522,40.411 ; v5(268.91,40.411) U3.A1@267.522,40.411
  Route2 w0.254: 269.773,71.577 270.561,72.365 pad.4@272.618,72.365
  Route2 w0.7: v4(265.887,75.463) 269.773,71.577 269.178,70.981 269.178,42.194 268.91,41.926 v5(268.91,40.411)
  Route15 w0.7: v5(261.671,82.245) 264.82,79.096 264.82,76.505 v4@265.875,75.451
  Bottom w0.127: U1.1@263.693,83.596 C7.2@263.693,84.77
  Bottom w0.254: 261.162,81.127 261.897,81.127 C6.P$1@262.153,80.871 263.693,82.411 U1.1@263.693,83.596 ; P3.1@262.23,35.763 262.23,36.119 262.56,36.119 VDD_5V.P$1@265.252,38.811 ; 263.5,84.963 263.5,85.496 263.855,85.852 265.201,85.852 265.608,85.446 U1.3@265.608,83.596
  Bottom w0.7: D1.CATHODE@259.085,79.324 259.385,79.324 260.426,80.365 Q1.4@260.426,81.127 261.162,81.127 261.162,81.761 ; VDD_5V.P$1@265.252,38.811 265.735,39.294 v1(266.37,39.294)
VDD_5V_IN: L103.P$1 L106.P$1 Q1.1 Q1.2 Q1.5 Q1.6 | length 41.1
  Route15 w0.7: v4(258.597,82.398) 258.445,82.55 258.445,81.103 265.848,73.7 265.848,70.305 265.977,70.176 265.977,69.575 265.848,69.446 265.848,65.53 265.901,65.477 265.901,64.876 265.848,64.823 265.848,63.015 265.85,63.013 265.85,62.412 265.848,62.41 265.848,59.002 265.876,58.974 265.876,58.374 265.848,58.346 265.848,56.259 265.977,56.13 265.977,55.573 v2(266.534,55.016)
  Bottom w0.7: Q1.5@259.461,81.128 Q1.6@258.511,81.128 258.511,83.547 Q1.2@259.461,83.547 259.461,84.085 259.753,84.376 L106.P$1@259.753,85.09 ; v2(266.534,55.016) 267.31,54.241 L103.P$1@267.31,51.473
pads on no net: U2.1 U2.2 U2.7 U2.8 U2.9 U2.24 U2.38 U2.83 U2.88 U2.91 U12.6 U12.7 U405.2 U405.3 U405.4 U405.5 U405.6 U405.7 U405.12 U405.14 U405.15 U405.16 U405.17 U405.19 U405.21 U$5.2 U$5.3 U$5.4 U$5.5 U$5.22 U$5.26 U$5.36 U$5.37 U$8.P$1 U$8.P$2
copper on no net: | length 0.1
  Top w0.127: 221.06,55.53 221.112,55.53

## Polygon pours and split planes (outlines as drawn)
VCC on Route15 "VCC_L05_P026" (solid, remove dead copper, pour order 26): 247.355,36.519 247.854,36.169 248.407,35.912 248.997,35.754 249.604,35.7 250.104,35.7 263.031,35.804 264.235,35.999 265.306,36.262 266.346,36.601 267.465,37.068 268.44,37.569 269.472,38.207 270.454,38.933 271.283,39.655 272.054,40.434 272.569,41.046 272.622,41.099 272.622,82.299 271.898,83.126 271.118,83.891 270.187,84.67 269.188,85.373 268.241,85.934 267.152,86.467 266.02,86.907 264.855,87.252 263.663,87.499 262.454,87.646 256.28,87.693 250.104,87.693 249.604,87.693 248.997,87.64 248.407,87.482 247.854,87.224 247.355,86.874 246.923,86.442 246.573,85.943 246.316,85.39 246.158,84.8 246.104,84.193 246.104,39.2 246.158,38.593 246.316,38.003 246.573,37.45 246.923,36.951
GND on Bottom "GND_L06_P038" (solid, remove dead copper, pour order 38): 247.355,36.519 247.854,36.169 248.407,35.912 248.997,35.754 249.604,35.7 250.104,35.7 263.031,35.804 264.235,35.999 265.306,36.262 266.346,36.601 267.465,37.068 268.44,37.569 269.472,38.207 270.454,38.933 271.283,39.655 272.054,40.434 272.569,41.046 272.622,41.099 272.622,82.299 271.898,83.126 271.118,83.891 270.187,84.67 269.188,85.373 268.241,85.934 267.152,86.467 266.02,86.907 264.855,87.252 263.663,87.499 262.454,87.646 256.28,87.693 250.104,87.693 249.604,87.693 248.997,87.64 248.407,87.482 247.854,87.224 247.355,86.874 246.923,86.442 246.573,85.943 246.316,85.39 246.158,84.8 246.104,84.193 246.104,39.2 246.158,38.593 246.316,38.003 246.573,37.45 246.923,36.951
VDD_5V on Route2 "VDD_5V_L04_P036" (solid, remove dead copper, pour order 36): 247.355,36.519 247.854,36.169 248.407,35.912 248.997,35.754 249.604,35.7 250.104,35.7 263.031,35.804 264.235,35.999 265.306,36.262 266.346,36.601 267.465,37.068 268.44,37.569 269.472,38.207 270.454,38.933 271.283,39.655 272.054,40.434 272.569,41.046 272.622,41.099 272.622,82.299 271.898,83.126 271.118,83.891 270.187,84.67 269.188,85.373 268.241,85.934 267.152,86.467 266.02,86.907 264.855,87.252 263.663,87.499 262.454,87.646 256.28,87.693 250.104,87.693 249.604,87.693 248.997,87.64 248.407,87.482 247.854,87.224 247.355,86.874 246.923,86.442 246.573,85.943 246.316,85.39 246.158,84.8 246.104,84.193 246.104,39.2 246.158,38.593 246.316,38.003 246.573,37.45 246.923,36.951
GND on Signal Layer 2 "GND_L03_P034" (solid, remove dead copper, pour order 34): 247.355,36.519 247.854,36.169 248.407,35.912 248.997,35.754 249.604,35.7 250.104,35.7 263.031,35.804 264.235,35.999 265.306,36.262 266.346,36.601 267.465,37.068 268.44,37.569 269.472,38.207 270.454,38.933 271.283,39.655 272.054,40.434 272.569,41.046 272.622,41.099 272.622,82.299 271.898,83.126 271.118,83.891 270.187,84.67 269.188,85.373 268.241,85.934 267.152,86.467 266.02,86.907 264.855,87.252 263.663,87.499 262.454,87.646 256.28,87.693 250.104,87.693 249.604,87.693 248.997,87.64 248.407,87.482 247.854,87.224 247.355,86.874 246.923,86.442 246.573,85.943 246.316,85.39 246.158,84.8 246.104,84.193 246.104,39.2 246.158,38.593 246.316,38.003 246.573,37.45 246.923,36.951
GND on Signal Layer 1 "GND_L02_P032" (solid, remove dead copper, pour order 32): 247.355,36.519 247.854,36.169 248.407,35.912 248.997,35.754 249.604,35.7 250.104,35.7 263.031,35.804 264.235,35.999 265.306,36.262 266.346,36.601 267.465,37.068 268.44,37.569 269.472,38.207 270.454,38.933 271.283,39.655 272.054,40.434 272.569,41.046 272.622,41.099 272.622,82.299 271.898,83.126 271.118,83.891 270.187,84.67 269.188,85.373 268.241,85.934 267.152,86.467 266.02,86.907 264.855,87.252 263.663,87.499 262.454,87.646 256.28,87.693 250.104,87.693 249.604,87.693 248.997,87.64 248.407,87.482 247.854,87.224 247.355,86.874 246.923,86.442 246.573,85.943 246.316,85.39 246.158,84.8 246.104,84.193 246.104,39.2 246.158,38.593 246.316,38.003 246.573,37.45 246.923,36.951
GND on Top "GND_L01_P028" (solid, remove dead copper, pour order 28): 247.355,36.519 247.854,36.169 248.407,35.912 248.997,35.754 249.604,35.7 250.104,35.7 263.031,35.804 264.235,35.999 265.306,36.262 266.346,36.601 267.465,37.068 268.44,37.569 269.472,38.207 270.454,38.933 271.283,39.655 272.054,40.434 272.569,41.046 272.622,41.099 272.622,82.299 271.898,83.126 271.118,83.891 270.187,84.67 269.188,85.373 268.241,85.934 267.152,86.467 266.02,86.907 264.855,87.252 263.663,87.499 262.454,87.646 256.28,87.693 250.104,87.693 249.604,87.693 248.997,87.64 248.407,87.482 247.854,87.224 247.355,86.874 246.923,86.442 246.573,85.943 246.316,85.39 246.158,84.8 246.104,84.193 246.104,39.2 246.158,38.593 246.316,38.003 246.573,37.45 246.923,36.951

## Silkscreen, mask and mechanical layers (free items; w line width, h text height)
Top Overlay:
  text "5V" at 261.442,85.801 h1.52
  text "TX" at 263.881,85.446 h1.52
  text "RX" at 266.649,84.684 h1.52
  text "G    L     H    5V / .    CAN        IN" at 249.809,84.607 h1.52
  text "CTS" at 267.614,83.464 h1.52
  text "RTS" at 269.189,81.966 h1.52
  text "GND" at 269.57,80.34 h1.52
  text "+  PWR PWM CL DA -" at 246.507,62.052 h1.52 r270
  text "VBUS  N    P    ID  G" at 248.666,55.601 h1.52 r90
  text "GND CTS RTS TX RX 5V" at 245.339,36.017 h1.52
Bottom Overlay:
  text "PX4FLOW v2.0" at 266.268,67.007 h1.52
Dimension:
  lines w0.01: 246.104,39.2 246.104,84.193 246.158,84.8 246.316,85.39 246.573,85.943 246.923,86.442 247.355,86.874 247.854,87.224 248.407,87.482 248.997,87.64 249.604,87.693 250.104,87.693 256.28,87.693 262.454,87.646 263.663,87.499 264.855,87.252 266.02,86.907 267.152,86.467 268.241,85.934 269.188,85.373 270.187,84.67 271.118,83.891 271.898,83.126 272.622,82.299 272.622,41.099 272.569,41.046 272.054,40.434 271.283,39.655 270.454,38.933 269.472,38.207 268.44,37.569 267.465,37.068 266.346,36.601 265.306,36.262 264.235,35.999 263.031,35.804 250.104,35.7 249.604,35.7 248.997,35.754 248.407,35.912 247.854,36.169 247.355,36.519 246.923,36.951 246.573,37.45 246.316,38.003 246.158,38.593 246.104,39.2 ; 248.945,38.76 249.961,38.76 250.012,38.811 250.012,45.06 256.286,45.06 256.286,46.101 249.072,46.101 248.945,45.974 248.945,38.76 ; 250.85,37.744 250.85,38.684 250.876,38.71 262.204,38.71 262.204,37.744 250.85,37.744 ; 257.378,45.06 263.119,45.06 263.195,44.983 263.195,38.913 263.322,38.786 264.262,38.786 264.262,45.999 264.16,46.101 257.378,46.101 257.378,45.06
tDocu:
  drawing of 264 lines, arcs and shapes, not listed
  text "Layer" at 218.069,139.573 h1.52
  text "Name" at 224.447,139.573 h1.52
  text "Material" at 236.779,139.573 h1.52
  text "Thickness" at 247.863,139.573 h1.52
  text "Constant" at 256.967,139.573 h1.52
  text "Board Layer Stack" at 265.393,139.573 h1.52
  text "1" at 218.069,136.525 h1.52
  text "Top Overlay" at 224.447,136.525 h1.52
  text "2" at 218.069,133.477 h1.52
  text "Top Solder" at 224.447,133.477 h1.52
  text "Solder Resist" at 236.779,133.477 h1.52
  text "0.010mm" at 247.863,133.477 h1.52
  text "3.5" at 256.967,133.477 h1.52
  text "3" at 218.069,130.429 h1.52
  text "Top" at 224.447,130.429 h1.52
  text "Copper" at 236.779,130.429 h1.52
  text "0.035mm" at 247.863,130.429 h1.52
  text "4" at 218.069,127.381 h1.52
  text "Dielectric 1" at 224.447,127.381 h1.52
  text "FR-4" at 236.779,127.381 h1.52
  text "0.500mm" at 247.863,127.381 h1.52
  text "4.8" at 256.967,127.381 h1.52
  text "5" at 218.069,124.333 h1.52
  text "Signal Layer 1" at 224.447,124.333 h1.52
  text "Copper" at 236.779,124.333 h1.52
  text "0.036mm" at 247.863,124.333 h1.52
  text "6" at 218.069,121.285 h1.52
  text "Dielectric 5" at 224.447,121.285 h1.52
  text "0.127mm" at 247.863,121.285 h1.52
  text "4.2" at 256.967,121.285 h1.52
  text "7" at 218.069,118.237 h1.52
  text "Signal Layer 2" at 224.447,118.237 h1.52
  text "Copper" at 236.779,118.237 h1.52
  text "0.036mm" at 247.863,118.237 h1.52
  text "8" at 218.069,115.189 h1.52
  text "Dielectric 4" at 224.447,115.189 h1.52
  text "0.254mm" at 247.863,115.189 h1.52
  text "4.2" at 256.967,115.189 h1.52
  text "9" at 218.069,112.141 h1.52
  text "Route2" at 224.447,112.141 h1.52
  text "Copper" at 236.779,112.141 h1.52
  text "0.035mm" at 247.863,112.141 h1.52
  text "10" at 218.069,109.093 h1.52
  text "Dielectric 2" at 224.447,109.093 h1.52
  text "FR-4" at 236.779,109.093 h1.52
  text "0.127mm" at 247.863,109.093 h1.52
  text "4.2" at 256.967,109.093 h1.52
  text "11" at 218.069,106.045 h1.52
  text "Route15" at 224.447,106.045 h1.52
  text "Copper" at 236.779,106.045 h1.52
  text "0.035mm" at 247.863,106.045 h1.52
  text "12" at 218.069,102.997 h1.52
  text "Dielectric 3" at 224.447,102.997 h1.52
  text "FR-4" at 236.779,102.997 h1.52
  text "0.254mm" at 247.863,102.997 h1.52
  text "4.2" at 256.967,102.997 h1.52
  text "13" at 218.069,99.949 h1.52
  text "Bottom" at 224.447,99.949 h1.52
  text "Copper" at 236.779,99.949 h1.52
  text "0.035mm" at 247.863,99.949 h1.52
  text "14" at 218.069,96.901 h1.52
  text "Bottom Solder" at 224.447,96.901 h1.52
  text "Solder Resist" at 236.779,96.901 h1.52
  text "0.010mm" at 247.863,96.901 h1.52
  text "3.5" at 256.967,96.901 h1.52
  text "15" at 218.069,93.853 h1.52
  text "Bottom Overlay" at 224.447,93.853 h1.52
  text "Black Mask white silk" at 242.164,90.399 h1.52

## Text inside footprints (layer, text, board x,y; h text height)
U405: Bottom Overlay "X" at 253.492,40.564 h1.52; Bottom Overlay "Y" at 254.686,41.631 h1.52; Bottom Overlay "Z" at 254.813,40.615 h1.52
U$5: Top Overlay "1" at 255.346,64.11 h1.52 r90